# EAGLE board diferencial-733 (EAGLE 7.2.0)

Size 100 x 80 mm. Coordinates in mm from the lower left corner, seen from the top.
Outline: 0,0 100,0 100,80 0,80 0,0
Copper layers (1*16): Top 0.035mm / dielectric 1.5mm / Bottom 0.035mm
Design rules "default": minimum track width 10mil, minimum drill 24mil, track to track 8mil, track to pad 8mil, pad to pad 8mil, via to via 8mil, smd to smd 8mil, copper to edge 40mil, drill to drill 8mil, minimum pad ring 10mil, minimum via ring 8mil, stop-mask expansion 4mil, vias tented up to drill 0mil, thermal gap 10mil

## Footprints (pad centres in the part's own frame; a part is rotated, then mirrored left to right if it is on the bottom)
DIL08 = drill 0.813 pad 1.27: 1 -3.81,-3.81; 2 -1.27,-3.81; 3 1.27,-3.81; 4 3.81,-3.81; 5 3.81,3.81; 6 1.27,3.81; 7 -1.27,3.81; 8 -3.81,3.81
TO220V = drill 1.016 pad 1.676 long: 1 -2.54,-2.54; 2 0,-2.54; 3 2.54,-2.54
DIL14 = drill 0.813 long: 1 -7.62,-3.81; 2 -5.08,-3.81; 3 -2.54,-3.81; 4 0,-3.81; 5 2.54,-3.81; 6 5.08,-3.81; 7 7.62,-3.81; 8 7.62,3.81; 9 5.08,3.81; 10 2.54,3.81; 11 0,3.81; 12 -2.54,3.81; 13 -5.08,3.81; 14 -7.62,3.81
RTRIM64W = drill 0.61: 1 1.27,-2.54; 2 1.27,0; 3 1.27,2.54
0207/7 = drill 0.813 pad 1.676 octagon: 1 -3.81,0; 2 3.81,0

## Placement (x,y rotation side)
IC1  LM555N  [DIL08]  -26.67,17.78 0 top  (outside the outline)
IC2  7805TV  [TO220V]  -31.75,31.75 0 top  (outside the outline)
IC3  MC79M15BT  [TO220V]  -20.32,31.75 0 top  (outside the outline)
IC4  7400N  [DIL14]  -22.86,6.35 0 top  (outside the outline)
R1  [RTRIM64W]  -36.83,6.35 0 top  (outside the outline)
R2  [RTRIM64W]  -16.51,17.78 0 top  (outside the outline)
R3  [0207/7]  -17.78,34.29 0 top  (outside the outline)
R4  [0207/7]  -27.94,34.29 0 top  (outside the outline)
R5  [0207/7]  -38.1,34.29 0 top  (outside the outline)
R6  [0207/7]  -17.78,39.37 0 top  (outside the outline)

## Library data of the parts
IC1-IC3 = linear
IC4 = 74xx-eu
R1 R2 = resistor
R3-R6 = rcl

## Nets
GND: IC1.1 R4.1 R5.1
N$1: IC4.14 R4.2
N$2: IC4.7 R5.2
V+: IC1.8

## Tracks (layer width: path | path; a pad name or v marks a point on that pad's centre or on a via)
GND  (2 unrouted)
N$1  (1 unrouted)
N$2  (1 unrouted)